# Altium PCB LMR33630.PcbDoc
Units mm, origin at the board's own origin, x right, y up, seen from the top; angles counter-clockwise.
Board outline 48 x 38 mm, 2 copper layers (Top Layer, Bottom Layer), stack 1.671 mm thick; 15 components, 8 nets, 37 pads, 10 vias.
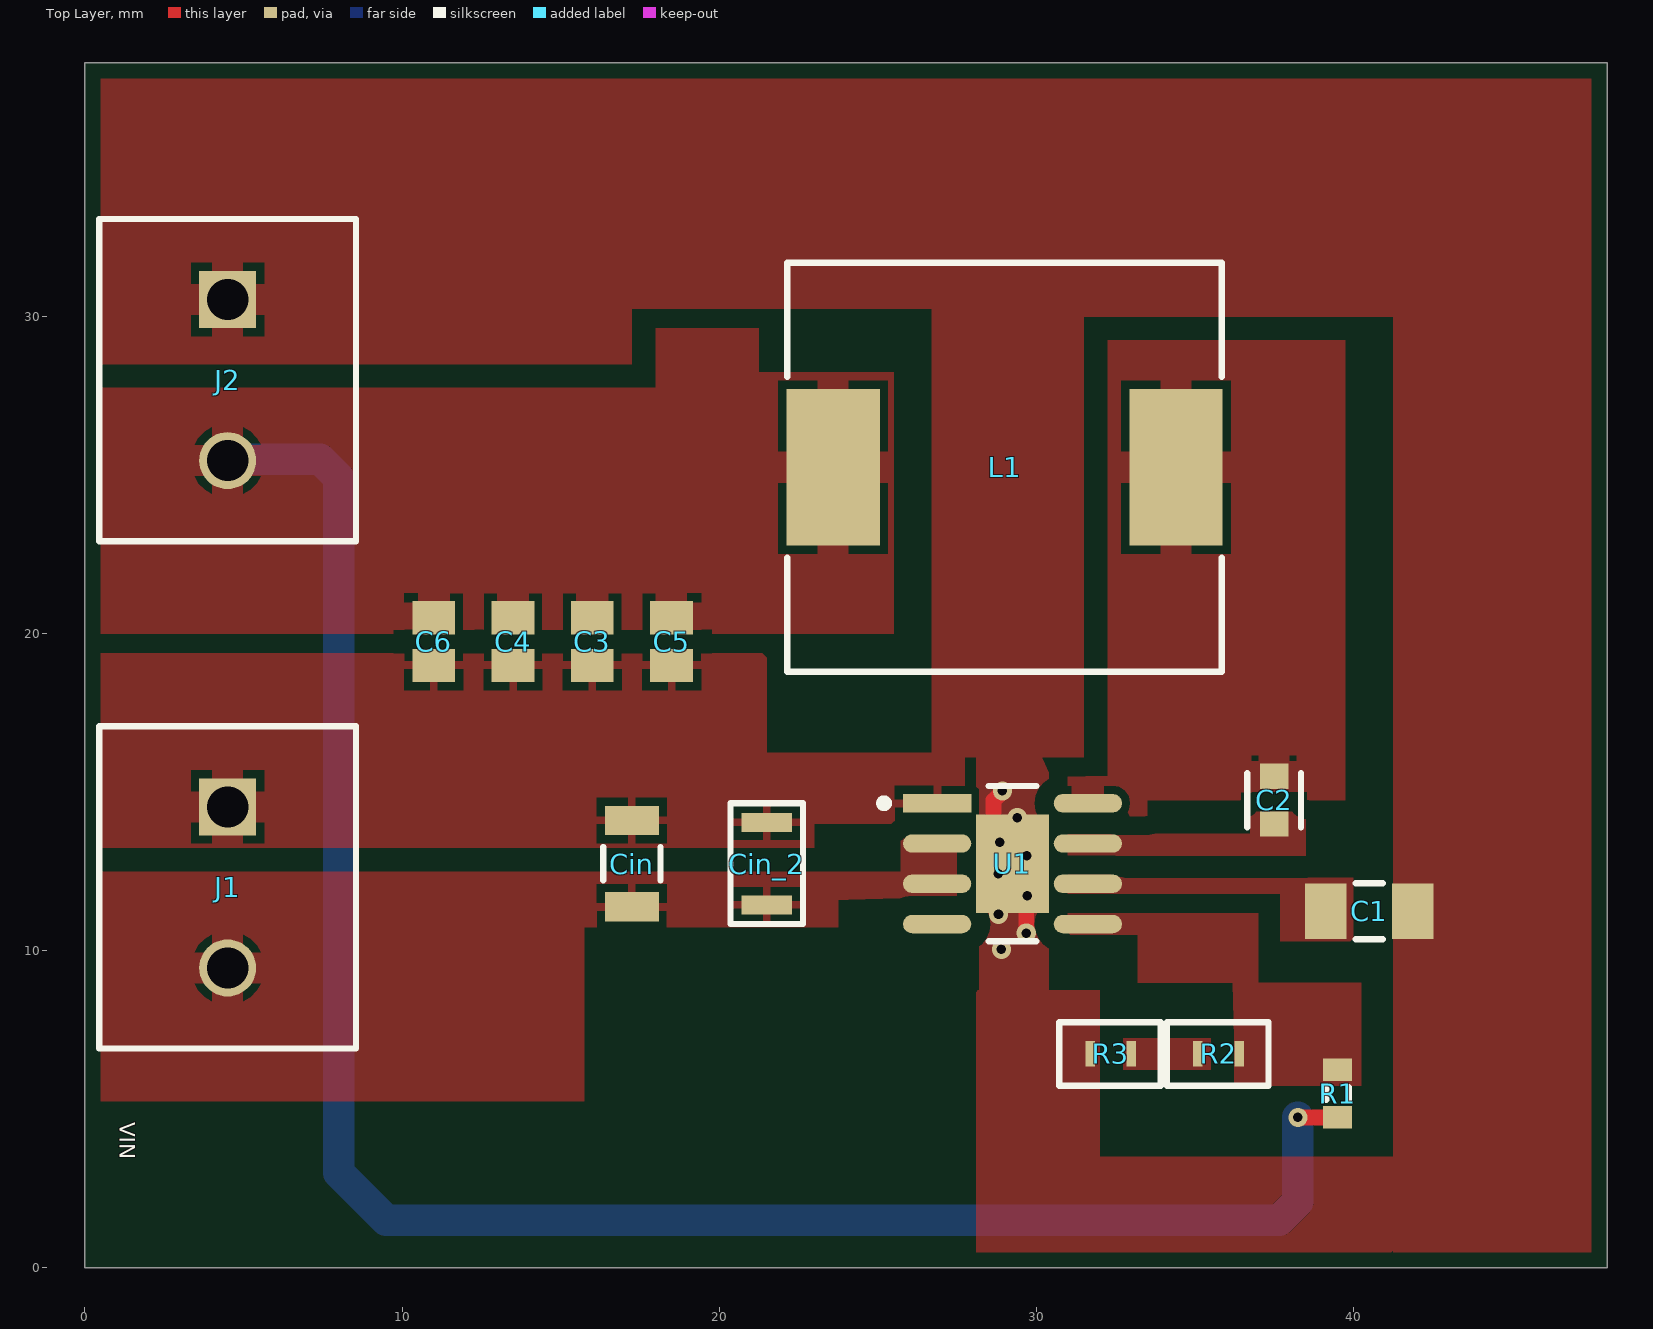
[diagram p0: Top Layer view]
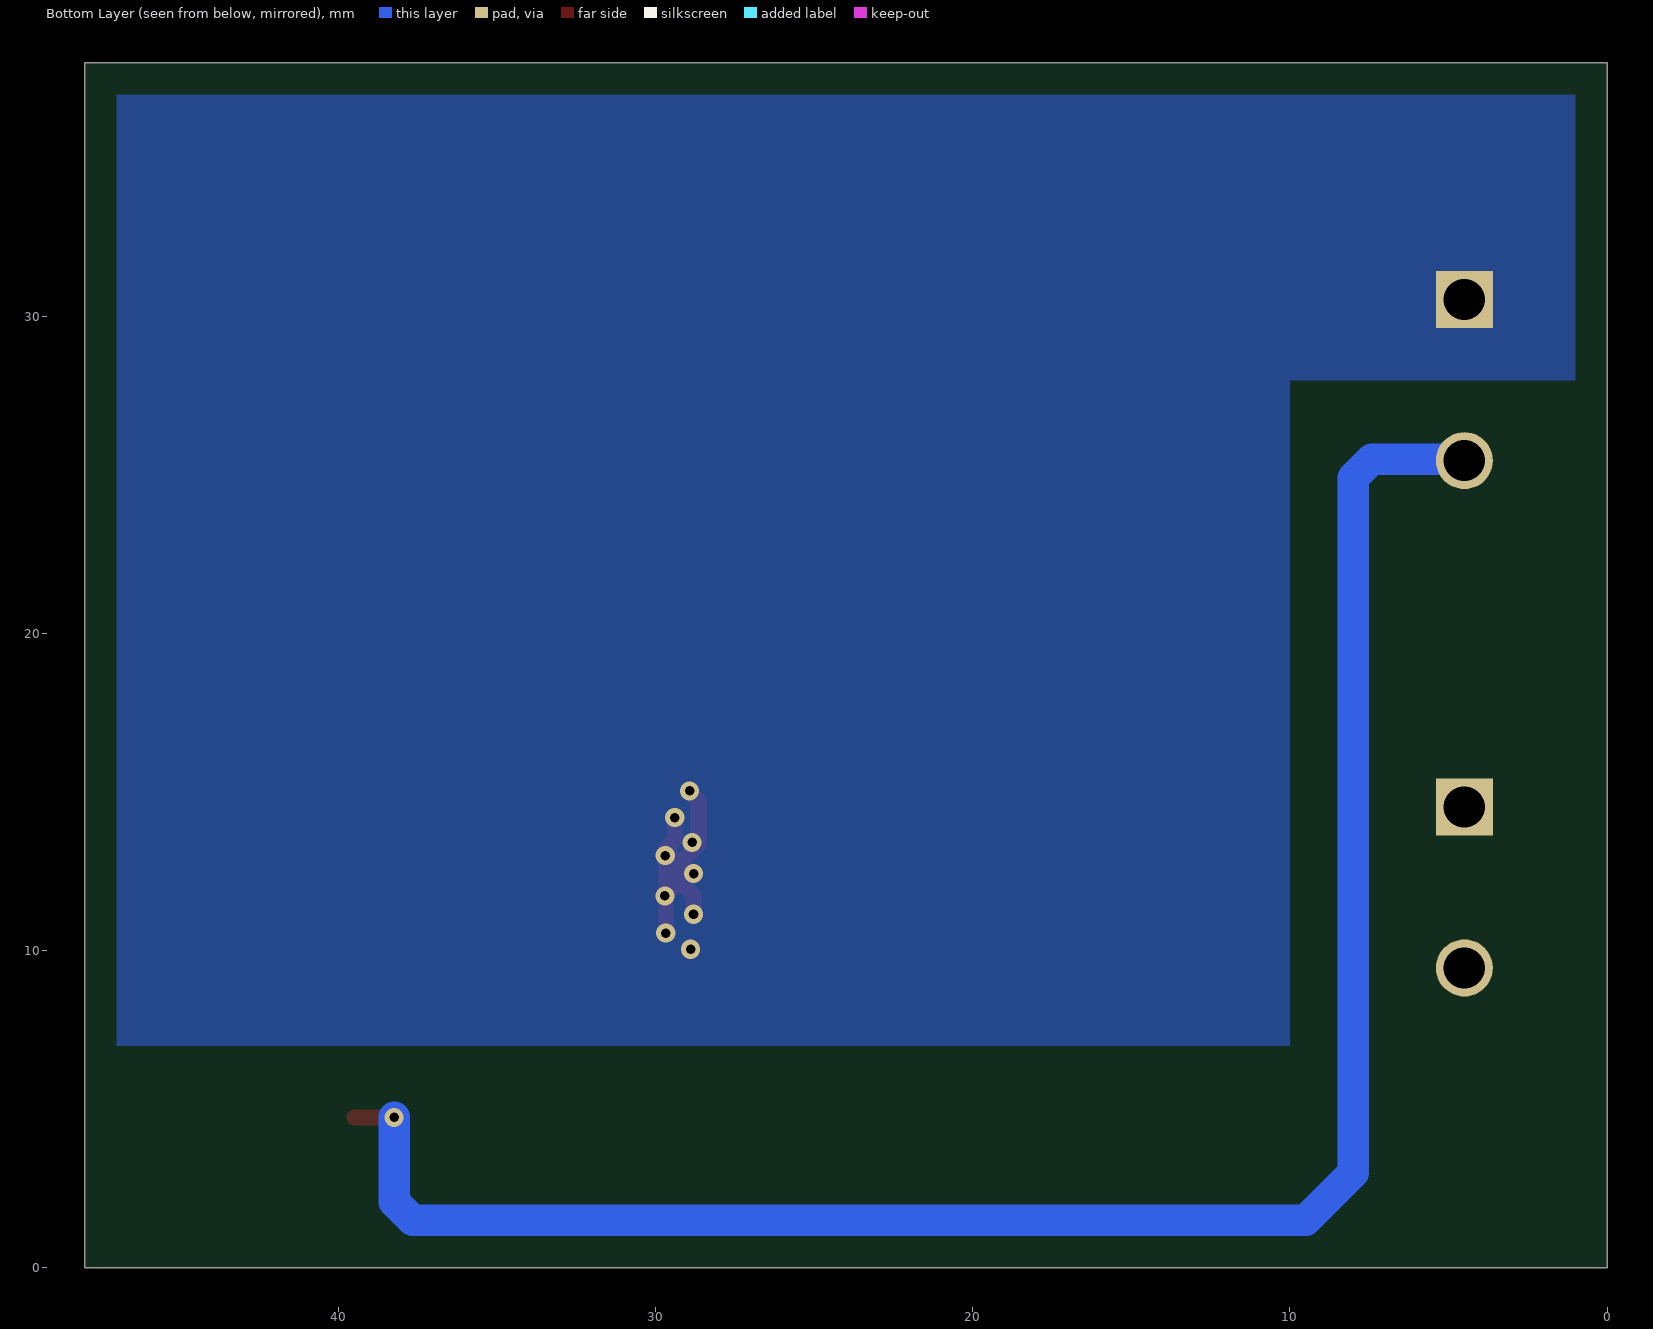
[diagram p1: Bottom Layer view, seen from below]
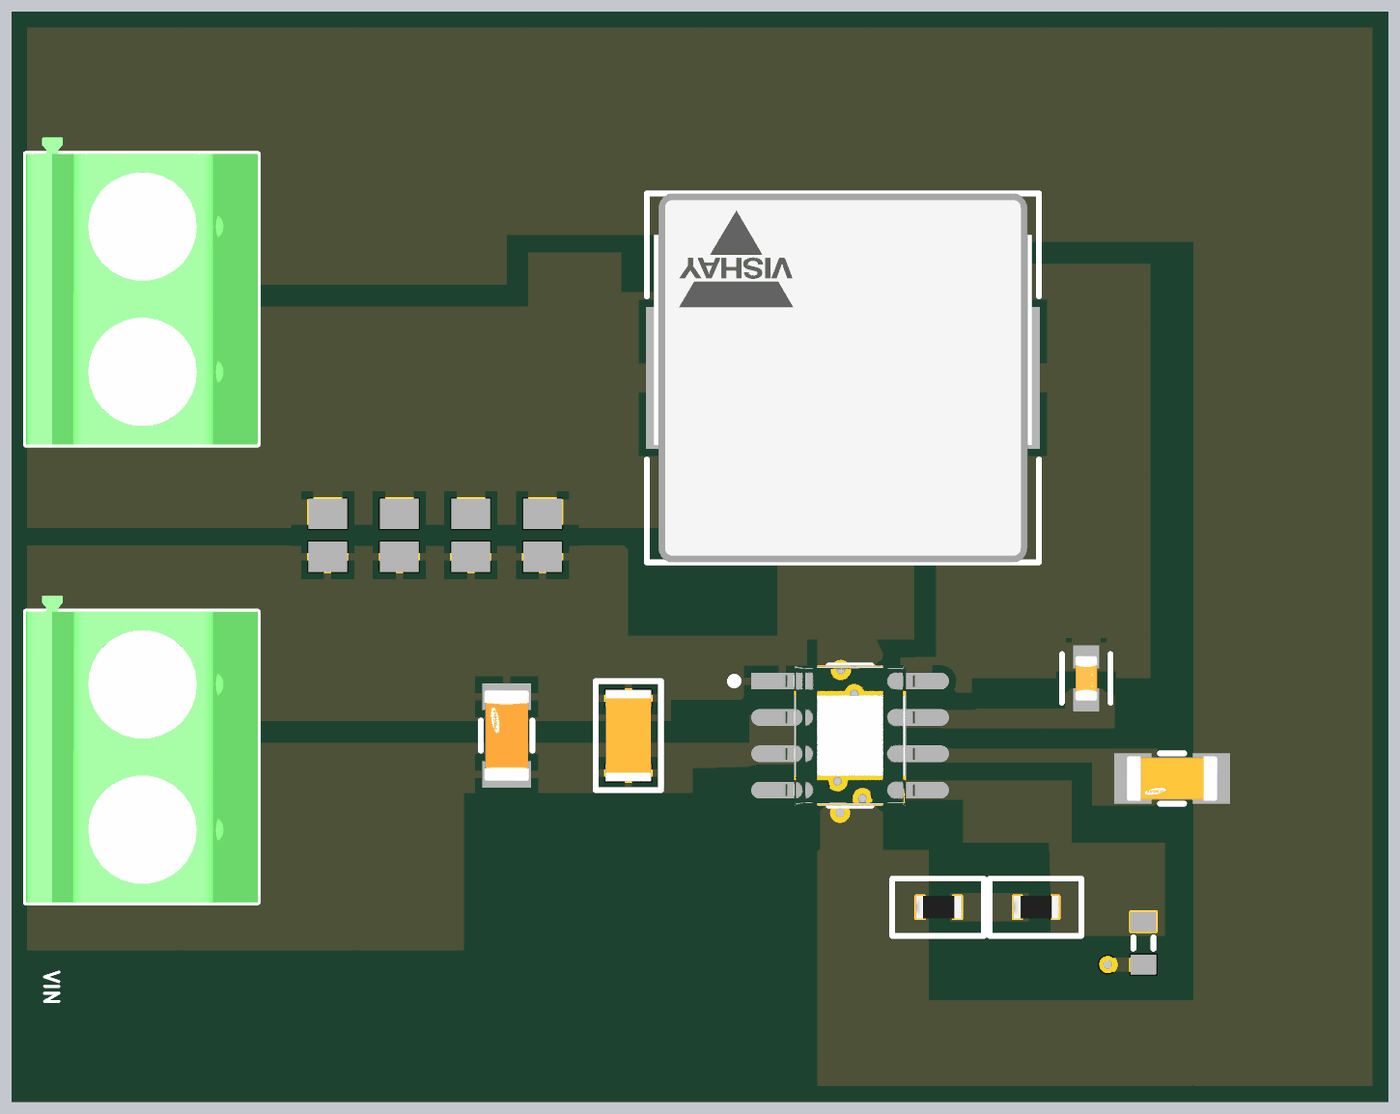
[diagram p2: 3D render of the assembled board from above, using the file's embedded part models]

## Layer stack, top to bottom
Top Solder: solder mask 0.0102, Solder Resist, Dk 3.5
Top Layer: signal copper 0.0356
Dielectric 1: dielectric 1.6, FR-4, Dk 4.8
Bottom Layer: signal copper 0.0356
Bottom Solder: solder mask 0.0102, Solder Resist, Dk 3.5

## Board outline
0,38 0,0 48,0 48,38

## Design rules (kind name [scope] priority, off if disabled: settings)
Clearance [All] p1: gap=0.6 ignorepadtopadclearanceinfootprint=FALSE except(0.127: SMDPad-SMDPad; 0.2: Arc-SMDPad Track-SMDPad; 0.254: Arc-Via Track-Via Via-Via; 0.33: Arc-THPad Track-THPad; 0.5: THPad-THPad)
MinimumSolderMaskSliver [All] p1: minsoldermaskwidth=0.2
PolygonConnect [All] p1: connectstyle=Direct reliefconductorwidth=0.254 reliefentries=4 polygonreliefangle="90 Angle" airgapwidth=0.254
RoutingVias [All] p1: holewidth=0.3 width=0.6 viastyle="Through Hole" minholewidth=0.3 minwidth=0.6 maxholewidth=0.3 maxwidth=0.6
SilkToSolderMaskClearance [IsPad] p1: minsilkscreentomaskgap=0.15 clearancetoexposedcopper=TRUE
SolderMaskExpansion [All] p1: expansion=0.05 istentingtop=FALSE
Width [All] p1: maxlimit=2 minlimit=0.127 preferedwidth=0.5
28 further rules are at their usual default settings.

## Components (designator, comment, footprint, x,y, rotation, side; value= is the part's Value field where it differs from the comment)
C1 "CL31B105KBHNNNE" FP-CL31-IPC_B 40.5,11.25 r180 top
C2 "CC0603KRX7R9BB104" FP-CC0603-DA-MFG 37.5,14.75 r90 top value="100 nF"
C3 "CL21A226MAQNNNE" CAPC2013X140X45LL15T25 16,19.75 r90 top
C4 "CL21A226MAQNNNE" CAPC2013X140X45LL15T25 13.5,19.75 r90 top
C5 "CL21A226MAQNNNE" CAPC2013X140X45LL15T25 18.5,19.75 r90 top
C6 "CL21A226MAQNNNE" CAPC2013X140X45LL15T25 11,19.75 r270 top
Cin "CL31B106KBHNNNE" FP-CL31B106KBHNNNE-MFG 17.25,12.75 r90 top value=10uF
Cin_2 "1206B224K500NT" Cap_1206_220nF 21.5,12.75 r270 top value="220 nF"
J1 "Input" PHOE-1729128-2_V 4.5,12 r270 top
J2 "Output" PHOE-1729128-2_V 4.5,28 r270 top
L1 "IHLP5050FDER100M01" FP-IHLP-5050FD-FP_2_945x4-MFG 29,25.25 r180 top
R1 "0603WAF1003T5E" J1-0603 39.5,5.5 r270 top value=100K
R2 "0603WAF2402T5E" Resistor_0603_910Ohm 35.75,6.75 r0 top value=24K
R3 "0603WAF9100T5E" Resistor_0603_910Ohm 32.35,6.75 r0 top value=910
U1 "LMR33630ADDAR" FP-DDA0008J-IPC_B 29.25,12.75 r0 top

## Footprints (in the part's own frame and the unit in brackets; to place one, negate y for a bottom-side part, rotate by r counter-clockwise, add the part's x,y. Pads: shape width x height; smd on the part's side, far side on the other; paste and mask are expansions set on the pad)
Cap_1206_220nF [mm]
  rect 0.6x1.6 smd: 1(-1.3,0) 2(1.3,0)
  silkscreen extent -1.91,-1.14 1.91,1.14, body extent -1.6,-0.8 1.6,0.8, height 0.6
CAPC2013X140X45LL15T25 [mm] "Chip Capacitor, 2-Leads, Body 2.00x1.25mm, IPC High Density"
  rect 1.05x1.35 smd: 1(-0.75,0) 2(0.75,0)
  body extent -1.08,-0.7 1.07,0.7, height 1.4
FP-CC0603-DA-MFG [mm]
  rect 0.8x0.9 smd paste+0 mask+0: 1(-0.75,0) 2(0.75,0)
  silkscreen extent -0.85,-0.85 0.85,0.85, body extent -1.35,-0.75 1.35,0.75, height 0.25
FP-CL31-IPC_B [mm]
  rect 1.305x1.758 smd paste+0 mask+0: 1(-1.376,0) 2(1.376,0)
  silkscreen extent -0.42,-0.88 0.42,0.88, body extent -2.28,-1.13 2.28,1.13, height 0.25
FP-CL31B106KBHNNNE-MFG [mm]
  rect 0.925x1.7 smd paste+0 mask+0: 1(-1.362,0) 2(1.362,0)
  silkscreen extent -0.53,-0.9 0.53,0.9, body extent -1.92,-1 1.92,1, height 0.25
FP-DDA0008J-IPC_B [mm]
  rect 2.153x0.582 smd paste+0 mask+0: 1(-2.377,1.905)
  rrect100% 2.153x0.582 smd paste+0 mask+0: 2(-2.377,0.635) 3(-2.377,-0.635) 4(-2.377,-1.905) 5(2.377,-1.905) 6(2.377,-0.635) 7(2.377,0.635) 8(2.377,1.905)
  rect 2.3x3.1 smd paste-1000 mask+0: 9(0,0)
  silkscreen extent -4.17,-2.45 0.75,2.45, body extent -3.7,-2.7 3.7,2.7, height 0.25
FP-IHLP-5050FD-FP_2_945x4-MFG [mm]
  rect 2.945x4.95 smd paste+0 mask+0: 1(-5.407,0) 2(5.407,0)
  silkscreen extent -6.85,-6.45 6.85,6.45, body extent -6.98,-6.55 6.98,6.55, height 0.25
J1-0603 [mm] "Chip Resistor, Body 1.6x0.8mm, IPC High Density"
  rect 0.7x0.9 smd: 1(-0.75,0) 2(0.75,0)
  silkscreen extent -0.2,-0.35 0.2,0.35, body extent -0.85,-0.48 0.85,0.48, height 0.9
PHOE-1729128-2_V [mm] "Receptacle, 2-Leads, Body 8.1x10.16mm, Pitch 5.08mm"
  rect 1.8x1.8 hole 1.3: 1(-2.54,0)
  round 1.8 hole 1.3: 2(2.54,0)
  silkscreen extent -5.08,-4.05 5.08,4.05, body extent -5.65,-4.05 5.08,4.05, height 10.01
Resistor_0603_910Ohm [mm]
  rect 0.3x0.8 smd: 1(-0.65,0) 2(0.65,0)
  silkscreen extent -1.63,-1 1.58,1, body extent -0.8,-0.4 0.8,0.4, height 0.45

## Part data
C1: library part CMP-13271-001662-1, "Cap Ceramic 1uF 50V X7R ±10% SMD 1206 +125°C Embossed T/R", #LCSC=C1848, Capacitance=1uF, Case Code (Imperial)=1206, Case Code (Metric)=3216, Dielectric=X7R, Manufacturer=Samsung, Max Operating Temperature=125°C, Min Operating Temperature=-55°C, Package Quantity=1, Tolerance=10%, Voltage=50V, Case/Package=1206, Contact Plating=Tin, Depth=1.6mm, Height=1.6mm, Lead Free="Lead Free", Length=3.2mm, Manufacturer Part Number=CL31B105KBHNNNE, Material=Ceramic, Mount="Surface Mount", Packaging="Tape and Reel", Radiation Hardening=No, Thickness=0.071inch, Voltage Rating=50V, Voltage Rating (DC)=50V, Width=0.063inch
C2: library part CMP-2100-03601-2, "CAP CER 0.1UF 50V X7R 0603", #LCSC=C14663, Capacitance="100 nF", Manufacturer=YAGEO, Package=CC0603-DA, Temperature="-55°C to +125°C", Temperature Characteristic=X7R, Temperature Coefficient=15%, Temperature Range High=+125°C, Temperature Range Low=-55°C, Tolerance=0.1, Voltage="50 V", Automotive=No, Category=Cap, ComponentLink2Description=Datasheet, ComponentLink2URL=http://www.yageo.com/documents/recent/UPY-GPHC_X7R_6.3V-to-50V_18.pdf, Device Class L1="Passive Components", Device Class L2=Capacitors, Device Class L3="Ceramic Capacitors", Digikey Description="CAP CER 0.1UF 50V X7R 0603", Footprint Url=http://www.yageo.com/exep/pages/download/literatures/UPY-C_GEN_24.pdf, Height=0.9mm, Lead Free=Yes, Manufacturer Part Number=CC0603KRX7R9BB104, Material=Ceramic, Mouser Description="Multilayer Ceramic Capacitor, CC Series, 0.1 - F, - 10%, X7R, 50 V, 0603 [1608 Metric]", Octopart=https://octopart.com/cc0603krx7r9bb104-yageo-42244635, RoHS=TRUE, Voltage Rating="50 V"
C3 C4 C5 C6: library part CMP-2000-06104-1, "Multi-layer Ceramic Capacitor, 22 uF, -55 to 85 degC, 2-Pin SMD (0805), RoHS, Tape and Reel", #LCSC=C45783, Capacitance=22µF, Manufacturer="Samsung Electro-Mechanics", Operating Temperature=-55°C~85°C, Package / Case=0805(2012Metric), Package Description="2-Pin Surface Mount Device, Body 2.0 x 1.25 mm", Package Reference=0805, Ratings=-, Standard Package=2,000, Temperature Coefficient=X5R, Tolerance=±20%, Voltage - Rated=25V, Applications=GeneralPurpose, Category=Capacitors, Datasheet URL=http://datasheet.octopart.com/CL21A226MAQNNNE-Samsung-datasheet-48647558.pdf, Datasheet Version=07/2015, Family=CeramicCapacitors, Featured Product=Multi-LayerCeramicCapacitors, Features=-, Height - Seated (Max)=-, Lead Spacing=-, Lead Style=-, Manufacturer Part Number=CL21A226MAQNNNE, Manufacturer URL=http://www.samsungsem.com/global/index.jsp, Mounting Technology=SurfaceMount, Mounting Type=SurfaceMount,MLCC, Online Catalog=CLSeries,HighCapacitance, Other Names=1276-2908-2, Packaging=Tape&Reel(TR), Product Training Modules=HighCapMLCCFamily, RoHS Information=MLCCRoHS2Compliance, Series=CL, Size / Dimension="0.079\"Lx0.049\"W(2.00mmx1.25mm)", Thickness (Max)="0.055\"(1.40mm)"
Cin: library part CMP-2000-07530-2, "CAP CER 10UF 50V X7R 1206", #LCSC=C89632, Capacitance=10uF, Manufacturer=Samsung, Temperature="-55°C to +125°C", Temperature Characteristic=X7R, Temperature Coefficient=15%, Temperature Range High=+125°C, Temperature Range Low=-55°C, Tolerance=10%, Voltage Rating=50V, Automotive=No, Category=Cap, ComponentLink2Description=Datasheet, ComponentLink2URL=http://www.samsungsem.com/global/front/downloadcms.do?path=%2F%2Fglobal%2F%2Fsupport%2F%2Fproduct-search%2F%2Fmlcc%2F%2F__icsFiles%2F%2Fafieldfile%2F%2F2019%2F%2F06%2F%2F18&fileName=CL31B106KBHNNNE-19.pdf, Device Class L1="Passive Components", Device Class L2=Capacitors, Device Class L3="Ceramic Capacitors", Digikey Description="CAP CER 10UF 50V X7R 1206", Height=1.8mm, Lead Free=Yes, Manufacturer Part Number=CL31B106KBHNNNE, Material=Ceramic, Octopart=https://octopart.com/cl31b106kbhnnne-samsung-30507377, Package=CL31B106KBHNNNE, RoHS=TRUE
Cin_2: library part "Cap Semi", "220nF ±10% 50V X7R 1206 Multilayer Ceramic Capacitors MLCC - SMD/SMT RoHS", #LCSC=C1857, Manufacturer="FH(Guangdong Fenghua Advanced Tech)", Datasheet=https://datasheet.lcsc.com/szlcsc/1810311313_FH-Guangdong-Fenghua-Advanced-Tech-1206B224K500NT_C1857.pdf, LatestRevisionDate=29-May-2009, LatestRevisionNote="IPC-7351 Footprint Added.", Manufacturer Part Number=1206B224K500NT, PackageDescription="Chip Capacitor", PackageReference=C1206, Published=8-Jun-2000, Publisher="Altium Limited"
J1 J2: library part CMP-2000-05815-1, "PCB Terminal Block, 13.5 A, 400 V, 2-Pin THD, RoHS, Bulk", #LCSC=C91153, Current Rating=13500mA, Manufacturer="Phoenix Contact", Package Description="2-Pin Through Hole Device, Body 8.1 x 10.16 mm, Pitch 5.08 mm", Package Reference=1729128-2, Package Version=03/2015, PartNumber=1729128, Voltage Rating=400V, Datasheet URL=https://datasheet.ciiva.com/16046/1729128-16046181.pdf, Datasheet Version=12/2013, Manufacturer URL=http://www.phoenixcontact.com/, Mounting Technology=ThroughHole, No. of Positions=2, No. of Rows=1, Orientation=Horizontal, Package URL=https://www.phoenixcontact.com/online/portal/pi/pxc/product_detail_page/!ut/p/b1/3VdJjqNKFDxLH8AFycySyWY2ozFsEPOMMQaDOX1XedGL_1Vdm5YXJleknhSKeBkvI6EA8ncAo3AYoDhBQGco6KN7VURTdemj9us_IEKEZo_YHiPAEWEFmDGOHMORkqKYCORBZxgL7ZoaZYcbFFUZ3fqxSY6GOuxydWUuHqz1ynmMFygu583Bob0Ewr6Sd_l-5m-kAueHiB0jpRwZwe58wwtkpxtMYd_LmGcDRU02dRNEyWt6Y2ti5pSyJ_reIkzIulrqApdnbT11V5jnCKbYNCvhEM1MCpPByat_X379-iThf08CI5GfOPqfBeS3BRoBOdD55AKVv0iLwCMq-2BrzXWSGRH7pUGD9uwXQjiph3xL0DKQwdGa0JImiIOmBNOestqgwTHSSs2oOep-78apyXQBvNi8ZLaFjvjWvcaUEBu0MC6Wbe-d6mB0FAebo2lUWinqYaZs5DAYzV0RP9yitUjnGJ0iI9xhZkT42OCQNUJJhkgWINNQLP2JFP6OpMg3JCVg70jqHT0lvKOnhHf0lPuOnnLf0VPuWx6_dxwUIvwk5WMkT0kLL1mh61l2yZVSzG3pYV_bqo-mj6uMKwKwdnnW8Jh5RTOJzMOA5c-eJDaZQw4mTMPH02PvS_ZAqNVjVTo2WyYLkwH_KU1mmmG5kjRhDqPXLwwVHvVOjCM60-fpXvTDfMGW1PVFVS1r4e4yVDk4ZdNbkUHvqPqQSeian4UD39fNKmachqdJ1NJbyk8rXT9mXTvPk3oE5meulKGgiruPJek-4I9hTT6G8ZLOyRSm2RRVbThERQad5OS28hdt4YW4vG0stgYYzsWsK4_7y6DZMjJSCqri1kyiZR5vD7pwIrNR7QwPHTcLTI5qT7eRlpHrdGiupYlqQDJ7zy_CND8fWWBoLRXxk1RVcXiBQwbTD4Xi7KL-FuO94t9xaqweXzH, Packing=Bulk, Pitch=5.08mm, RoHS=TRUE
L1: library part CMP-02424-000485-1, "FIXED IND 10UH 10A 17.2 MOHM SMD", Case/Package=5050, Current Rating=10A, DC Resistance (DCR)=17.2mR, Inductance=10uH, Inductance Tolerance=20%, Manufacturer=Vishay, Max DC Current=15.5A, Max Operating Temperature=125°C, Min Operating Temperature=-55°C, Package Quantity=250, Self Resonant Frequency=5MHz, Test Frequency=100kHz, Contact Plating=Tin, Core Material=Metal, Depth=12.9mm, Height=6.5mm, Height - Seated (Max)=0.256inch, Lead Free="Lead Free", Length=13.7mm, Manufacturer Part Number=IHLP5050FDER100M01, Military Standard=Not, Mount="Surface Mount", Number of Pins=2, Packaging="Tape and Reel", Radiation Hardening=No, RMS Current (Irms)=10A, Saturation Current=15.5A, Shielding=Shielded, Termination=SMD/SMT, Tolerance=20%, Width=0.508inch
R1: library part Res3, "100kΩ ±1% 0.1W ±100ppm/℃ 0603 Chip Resistor - Surface Mount RoHS", #LCSC=C25803, Manufacturer="UNI-ROYAL(Uniroyal Elec)", LatestRevisionDate=29-May-2009, LatestRevisionNote="IPC-7351 Footprint Added.", Manufacturer Part Number=0603WAF1003T5E, PackageDescription="Chip Resistor", PackageReference=J1-0603, Published=8-Jun-2000, Publisher="Altium Limited"
R2: library part Res3, "24kΩ ±1% 0.1W ±100ppm/℃ 0603 Chip Resistor - Surface Mount RoHS", #LCSC=C23352, Manufacturer="UNI-ROYAL(Uniroyal Elec)", LatestRevisionDate=29-May-2009, LatestRevisionNote="IPC-7351 Footprint Added.", Manufacturer Part Number=0603WAF2402T5E, PackageDescription="Chip Resistor", PackageReference=J1-0603, Published=8-Jun-2000, Publisher="Altium Limited"
R3: library part Res3, "910Ω ±1% 0.1W ±100ppm/℃ 0603 Chip Resistor - Surface Mount RoHS", #LCSC=C23264, Manufacturer="UNI-ROYAL(Uniroyal Elec)", LatestRevisionDate=29-May-2009, LatestRevisionNote="IPC-7351 Footprint Added.", Manufacturer Part Number=0603WAF9100T5E, PackageDescription="Chip Resistor", PackageReference=J1-0603, Published=8-Jun-2000, Publisher="Altium Limited"
U1: library part CMP-04918-000184-1, "IC REG BUCK ADJUSTABLE 3A 8SOPWR", #LCSC=C841384, Manufacturer="Texas Instruments", Max Input Voltage=36V, Max Operating Temperature=125°C, Max Output Voltage=24V, Min Input Voltage=3.8V, Min Operating Temperature=-40°C, Min Output Voltage=1V, Output Current=3A, Switching Frequency=400kHz, Manufacturer Part Number=LMR33630ADDAR, Mount="Surface Mount", Number of Outputs=1, Number of Pins=8, Output Configuration=Positive, Output Type=Adjustable, Packaging="Cut Tape", RoHS Compliant=Yes, Synchronous Rectifier=Yes

## Via types
v1: diameter 0.6, hole 0.3, Top Layer to Bottom Layer, 10 vias

## Nets (pads, with @x,y where several pads share a name; then routed paths per layer and width w, separated by ;. In a path a pad name is that pad's centre, name@x,y a point inside that pad or via, vN(x,y) a via of type N, cw(c..) or ccw(c..) an arc to the next point about the centre after c; other vN are vias at no path point)
+5V: C3.2 C4.2 C5.2 C6.1 J2.2 L1.2 R1.2 | length 60.7
  Top Layer w0.5: v1(38.25,4.75) R1.2
  Bottom Layer w1: J2.2 4.54,25.5 7.414,25.5 8,24.914 8,3 9.5,1.5 37.664,1.5 38.25,2.086 v1(38.25,4.75)
GND: C1.1 C3.1 C4.1 C5.1 C6.2 Cin.2 Cin_2.1 J1.1 J2.1 R3.1 U1.1 U1.9 | length 10.2
  Top Layer w0.5: v1(28.807,12.432) 28.932,12.432 U1.9 ; v1(28.809,11.154) 28.809,11.757 U1.9@29.25,12.198 ; v1(28.85,13.418) U1.9@28.716,13.284 ; v1(28.929,15.042) 28.929,15.015 28.651,14.738 28.651,13.349 U1.9@28.716,13.284 ; v1(29.4,14.2) 29.4,13.503 29.701,13.201 29.6,13.1 29.425,12.925 U1.9 ; U1.9@29.553,13.053 29.684,12.922 29.684,11.736 v1(29.684,10.561) ; v1(29.712,11.736) U1.9@29.25,12.198 ; U1.9@28.716,13.284 U1.9 ; U1.9@29.25,12.198 U1.9
  other v1: 28.9,10.05 29.7,13
NetC1_2: C1.2 U1.6
NetC2_1: C2.1 U1.7
NetC2_2: C2.2 L1.1 U1.8
NetR1_1: R1.1 R2.2 U1.5
NetR2_1: R2.1 R3.2
VIN: Cin.1 Cin_2.2 J1.2 U1.2 U1.3
pads on no net: U1.4

## Polygon pours and split planes (outlines as drawn)
GND on Top Layer "GND_L01_P005" (solid, pour order 5): 28.2,16.5 28.2,8.7 30.4,8.7 30.4,15.62 30,16.5
GND on Top Layer "GND_L01_P012" (solid, pour order 12): 7.575,13.25 23,13.25 23,14 27.75,14 27.75,16.25 21.5,16.25 21.5,19.25 21.25,19.5 7.575,19.5
GND on Top Layer "GND_L01_P028" (solid, pour order 28): 7.575,19.388 7.563,19.4 0.5,19.4 0.5,13.4 0.4,13.3 0.45,13.25 7.575,13.25
+5V on Top Layer "+5V_L01_P002" (solid, pour order 2): 0.5,27.75 0.5,20 25.5,20 25.5,28.25 21.25,28.25 21.25,29.75 18,29.75 18,27.75
NetC2_1 on Top Layer "NETC2_1_L01_P021" (solid, pour order 21): 31,13.7 31,13 38.5,13 38.5,13.25 38.5,14.5 36.75,14.5 36.75,13.7
NetC2_2 on Top Layer "NETC2_2_L01_P018" (solid, pour order 18): 31,14.25 33.5,14.25 33.5,14.75 39.75,14.75 39.75,29.25 32.25,29.25 32.25,15.5 31,15.5
GND on Top Layer "GND_L01_P004" (solid, pour order 4): 28.1,14.3 30.1,15.1 30.4,30.3 28.1,30.3
GND on Top Layer "GND_L01_P003" (solid, pour order 3): 47.5,37.5 47.5,0.5 41.25,0.5 41.25,30 31.5,30 31.25,30.25 23,30.25 23,37.5
NetR1_1 on Top Layer "NETR1_1_L01_P024" (solid, pour order 24): 36.25,7.25 36.25,5.75 40.25,5.75 40.25,9 37,9 37,11.2 33.2,11.2 30.6,11.2 30.6,10.5 33.2,10.5 33.2,9 36.1,9 36.2,9
NetC1_2 on Top Layer "NETC1_2_L01_P023" (solid, pour order 23): 30.7,12.5 30.7,11.8 37.7,11.8 37.7,10.3 39.9,10.3 40,10.4 40,12.3 32.9,12.3 32.9,12.5
NetR2_1 on Top Layer "NETR2_1_L01_P020" (solid, pour order 20): 32.75,7.25 32.75,6.25 35.5,6.25 35.5,7.25
GND on Top Layer "GND_L01_P019" (solid, pour order 19): 28.1,0.5 41.25,0.5 41.3,0.55 41.3,3.5 32,3.5 32,8.75 28.15,8.75 28.1,8.7
VIN on Top Layer "VIN_L01_P016" (solid, pour order 16): 23.4,11.6 27.525,11.7 27.525,13.6 25.725,13.6 25.725,12.5 23.75,12.5
VIN on Top Layer "VIN_L01_P015" (solid, pour order 15): 15.75,12.5 23.75,12.5 23.75,10.75 15.75,10.75
VIN on Top Layer "VIN_L01_P014" (solid, pour order 14): 0.5,12.5 15.75,12.5 15.75,5.25 0.5,5.25
GND on Top Layer "GND_L01_P009" (solid, pour order 9): 31.5,30.25 31.5,16.1 30.1,16.1 30.1,30.3
GND on Top Layer "GND_L01_P006" (solid, pour order 6): 28.1,16.1 26.7,16.1 26.7,30.3 28.1,30.3
GND on Top Layer "GND_L01_P000" (solid, pour order 0): 0.5,28.5 0.5,37.5 23,37.5 23,30.25 17.25,30.25 17.25,28.5
GND on Bottom Layer "GND_L02_P027" (solid, pour order 27): 47,28 47,7 10,7 10,28
GND on Bottom Layer "GND_L02_P026" (solid, pour order 26): 1,37 1,28 47,28 47,37

## Silkscreen, mask and mechanical layers (free items; w line width, h text height)
Top Overlay:
  text "VIN" at 1.1,4.6 h0.5 r270
Board Outline:
  the board outline again, w0.1